# EAGLE board PCB Layout (EAGLE 9.7.0)
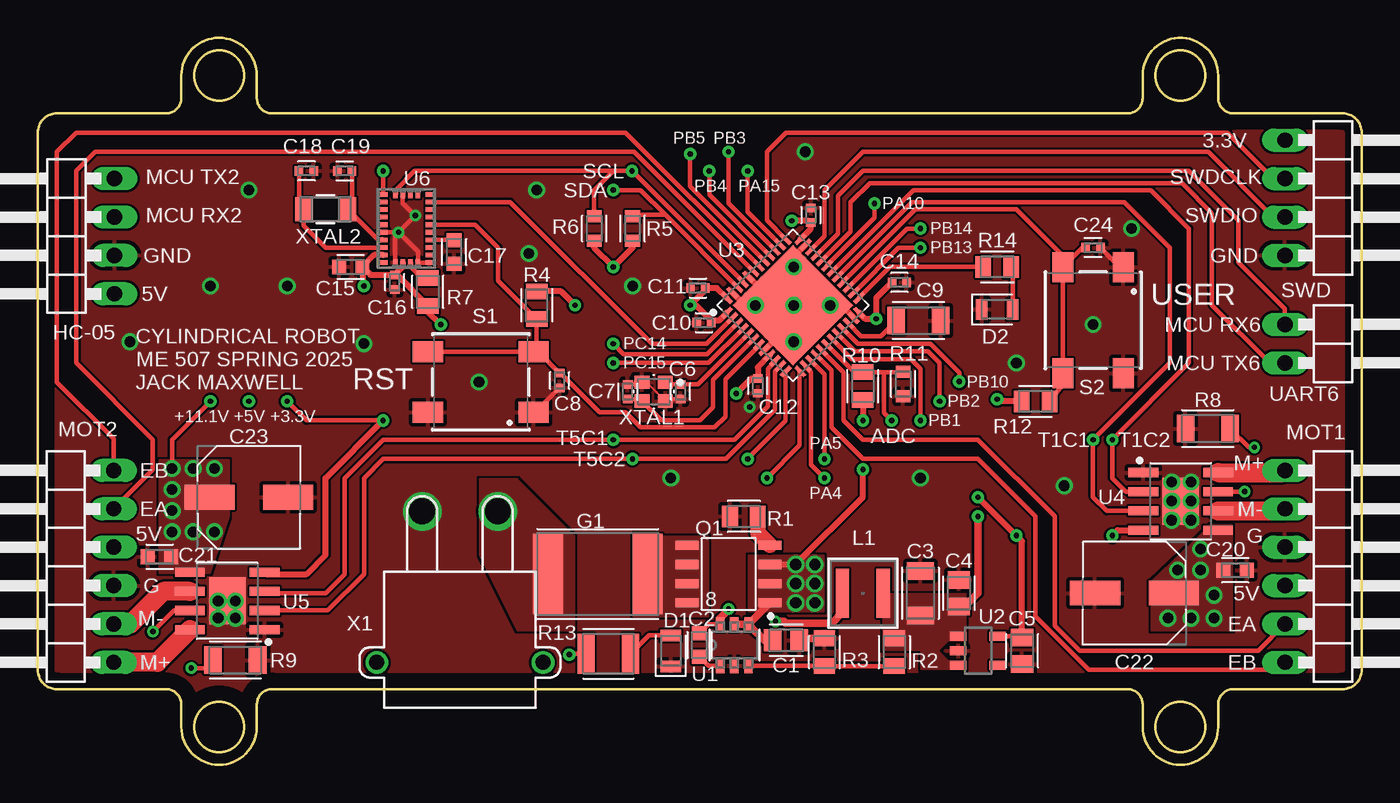
[diagram p0: board, top side]
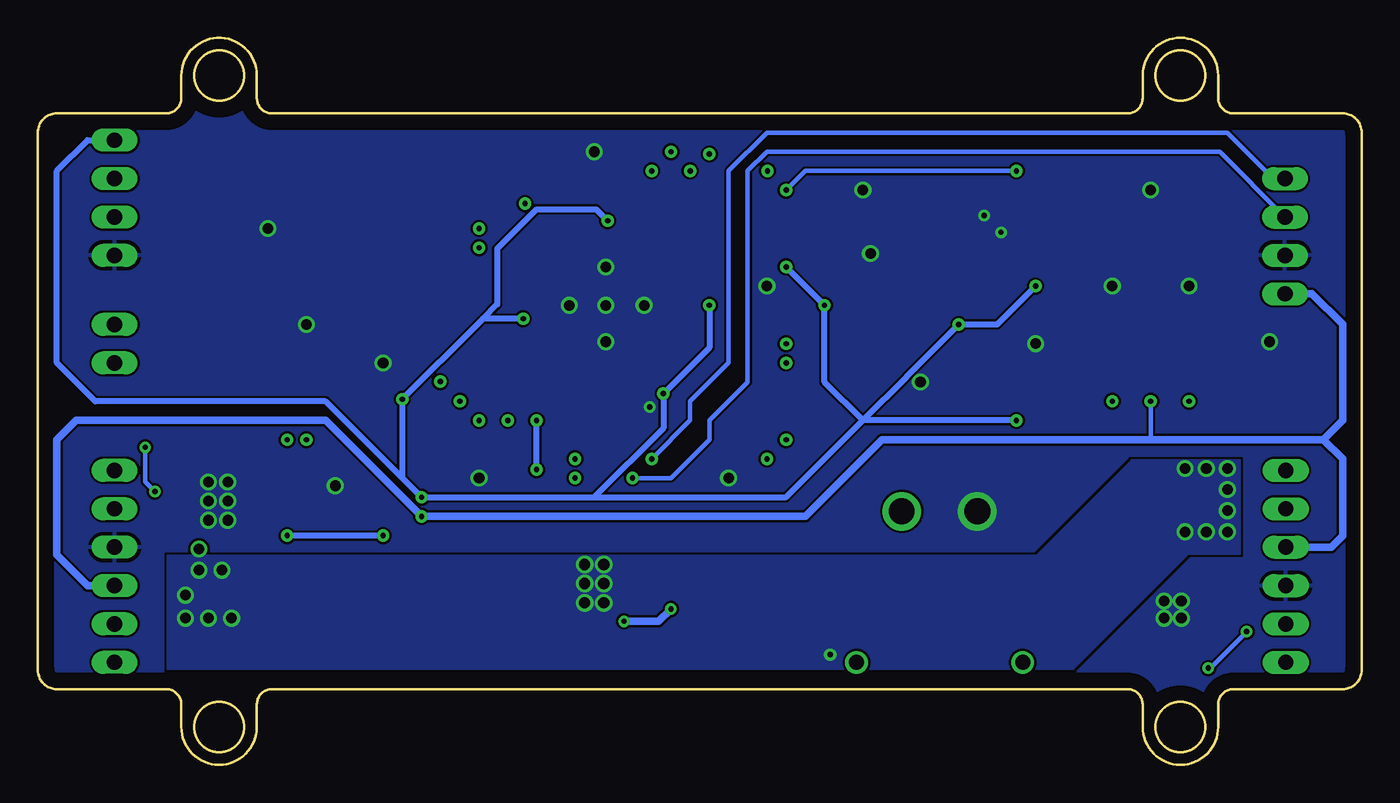
[diagram p1: board, bottom side, seen from below]

Size 87.63 x 48.1 mm. Coordinates in mm from the lower left corner, seen from the top.
Outline: 0,6.27 arc90 1.27,5 8.5,5 arc-90 9.5,4 9.5,2.5 arc180 14.5,2.5 14.5,4 arc-90 15.5,5 72.13,5 arc-90 73.13,4 73.13,2.5 arc180 78.13,2.5 78.13,4 arc-90 79.13,5 86.36,5 arc90 87.63,6.27 87.63,41.83 arc90 86.36,43.1 79.13,43.1 arc-90 78.13,44.1 78.13,45.6 arc180 73.13,45.6 73.13,44.1 arc-90 72.13,43.1 15.5,43.1 arc-90 14.5,44.1 14.5,45.6 arc180 9.5,45.6 9.5,44.1 arc-90 8.5,43.1 1.27,43.1 arc90 0,41.83 0,6.27
Outline: circle at 12,2.5 radius 1.65
Outline: circle at 12,45.6 radius 1.65
Outline: circle at 75.63,2.5 radius 1.65
Outline: circle at 75.63,45.6 radius 1.65
Copper layers (1*16): Top 0.035mm / dielectric 1.5mm / Bottom 0.035mm
Design rules "Fusion Electronics Design Rules": minimum track width 6mil, minimum drill 0.35mm, track to track 6mil, track to pad 6mil, pad to pad 6mil, via to via 6mil, smd to smd 6mil, copper to edge 40mil, drill to drill 6mil, minimum pad ring 10mil, minimum via ring 8mil, stop-mask expansion 4mil, vias tented up to drill 9999mil, thermal gap 10mil

## Footprints (pad centres in the part's own frame; a part is rotated, then mirrored left to right if it is on the bottom)
CAPC2012X110 = smd 1.165 x 1.465: 1 -0.875,0; 2 0.875,0
CAPC1608X85 = smd 0.921 x 0.97: 1 -0.775,0; 2 0.775,0
CAPC3216X135 = smd 1.165 x 1.815: 1 -1.475,0; 2 1.475,0
CAPC1005X60 = smd 0.56 x 0.629: 1 -0.485,0; 2 0.485,0
CAPAE660X800N = smd 3.314 x 1.622: 1 -2.601,0; 2 2.601,0
LEDC2012X110N_FLAT-G = smd 0.762 x 1.362: A 1.025,0; C -1.025,0
LEDC2012X110N_FLAT-R = smd 0.762 x 1.362: A 1.025,0; C -1.025,0
FUSC7351X160 = smd 2 x 5.3: 1 -3.3,0; 2 3.3,0
1X04/90 = drill 1.016 long: 1 -3.81,-3.81; 2 -1.27,-3.81; 3 1.27,-3.81; 4 3.81,-3.81
IND_XGL4040_COC = smd 0.864 x 3.251: 1 -1.346,0; 2 1.346,0
1X06/90 = drill 1.016 long: 1 -6.35,-3.81; 2 -3.81,-3.81; 3 -1.27,-3.81; 4 1.27,-3.81; 5 3.81,-3.81; 6 6.35,-3.81
SO-8 = smd 1.524 x 0.61: 1 -2.743,1.905; 2 -2.743,0.635; 3 -2.743,-0.635; 4 -2.743,-1.905; 5 2.743,-1.905; 6 2.743,-0.635; 7 2.743,0.635; 8 2.743,1.905
RESC2012X65 = smd 1.031 x 1.42: 1 -0.919,0; 2 0.919,0
RESC1608X60 = smd 0.799 x 0.974: 1 -0.815,0; 2 0.815,0
RESC3216X70 = smd 1.165 x 1.815: 1 -1.475,0; 2 1.475,0
RESC3224X71 = smd 1.131 x 2.66: 1 -1.47,0; 2 1.47,0
430481035816 = smd 2 x 1.4: 1 -3.5,2; 2 3.5,2; 3 -3.5,-2; 4 3.5,-2
LMR54406DBVR_TEX = smd 0.978 x 0.559: 1 -1.365,0.94; 2 -1.365,0; 3 -1.365,-0.94; 4 1.365,-0.94; 5 1.365,0; 6 1.365,0.94
DBV0005A-MFG = smd 1.1 x 0.6: 1 -1.3,0.95; 2 -1.3,0; 3 -1.3,-0.95; 4 1.3,-0.95; 5 1.3,0.95
QFN50P700X700X100-48N = smd 0.862 x 0.274: 1 -3.435,2.75; 2 -3.435,2.25; 3 -3.435,1.75; 4 -3.435,1.25; 5 -3.435,0.75; 6 -3.435,0.25; 7 -3.435,-0.25; 8 -3.435,-0.75; 9 -3.435,-1.25; 10 -3.435,-1.75; 11 -3.435,-2.25; 12 -3.435,-2.75; 25 3.435,-2.75; 26 3.435,-2.25; 27 3.435,-1.75; 28 3.435,-1.25; 29 3.435,-0.75; 30 3.435,-0.25; 31 3.435,0.25; 32 3.435,0.75; 33 3.435,1.25; 34 3.435,1.75; 35 3.435,2.25; 36 3.435,2.75 | smd 0.274 x 0.862: 13 -2.75,-3.435; 14 -2.25,-3.435; 15 -1.75,-3.435; 16 -1.25,-3.435; 17 -0.75,-3.435; 18 -0.25,-3.435; 19 0.25,-3.435; 20 0.75,-3.435; 21 1.25,-3.435; 22 1.75,-3.435; 23 2.25,-3.435; 24 2.75,-3.435; 37 2.75,3.435; 38 2.25,3.435; 39 1.75,3.435; 40 1.25,3.435; 41 0.75,3.435; 42 0.25,3.435; 43 -0.25,3.435; 44 -0.75,3.435; 45 -1.25,3.435; 46 -1.75,3.435; 47 -2.25,3.435; 48 -2.75,3.435 | smd 5.6 x 5.6: 49 0,0
DRV8231DDAR = smd 1.969 x 0.602: 1 -2.474,1.905; 2 -2.474,0.635; 3 -2.474,-0.635; 4 -2.474,-1.905; 5 2.474,-1.905; 6 2.474,-0.635; 7 2.474,0.635; 8 2.474,1.905 | smd 2.41 x 3.1: 9 0,0
QFN_BNO055_BOS = smd 0.305 x 0.533: 1 -2.25,1.537; 6 -2.25,-1.537; 7 -1.75,-1.537; 8 -1.25,-1.537; 9 -0.75,-1.537; 10 -0.25,-1.537; 11 0.25,-1.537; 12 0.75,-1.537; 13 1.25,-1.537; 14 1.75,-1.537; 15 2.25,-1.537; 20 2.25,1.537; 21 1.75,1.537; 22 1.25,1.537; 23 0.75,1.537; 24 0.25,1.537; 25 -0.25,1.537; 26 -0.75,1.537; 27 -1.25,1.537; 28 -1.75,1.537 | smd 0.432 x 0.305: 2 -2.235,0.75; 3 -2.235,0.25; 4 -2.235,-0.25; 5 -2.235,-0.75; 16 2.235,-0.75; 17 2.235,-0.25; 18 2.235,0.25; 19 2.235,0.75
1X02/90 = drill 1.016 long: 1 -1.27,-3.81; 2 1.27,-3.81
XT30PW-M = drill 1.7: 1 2.5,0; 2 -2.5,0 | drill 1: 3 5.5,10; 4 -5.5,10
OSCCC200X160X50N = smd 0.974 x 0.874: 1 -0.771,-0.621; 2 0.771,-0.621; 3 0.771,0.621; 4 -0.771,0.621
CHIP_NX3215S_NDK = smd 1.118 x 1.6: 1 -1.448,0; 2 1.448,0

## Placement (x,y rotation side)
C1  2.2uF  [CAPC2012X110]  49.53,8.23 0 top
C2  100nF  [CAPC1608X85]  43.79,7.92 90 top
C3  22uF  [CAPC3216X135]  58.42,11.35 90 top
C4  1uF  [CAPC2012X110]  60.96,11.35 90 top
C5  1uF  [CAPC2012X110]  65.15,7.54 270 top
C6  2pF  [CAPC1005X60]  42.55,24.69 270 top
C7  2pF  [CAPC1005X60]  39.04,24.69 90 top
C8  100nF  [CAPC1005X60]  34.54,25.43 270 top
C9  4.7uF  [CAPC3216X135]  58.29,29.38 0 top
C10  100nF  [CAPC1005X60]  44.1,29.26 180 top
C11  100nF  [CAPC1005X60]  43.69,31.54 180 top
C12  100nF  [CAPC1005X60]  47.65,25.07 270 top
C13  100nF  [CAPC1005X60]  51.16,36.37 90 top
C14  100nF  [CAPC1005X60]  57.02,31.92 0 top
C15  120nF  [CAPC1608X85]  20.71,32.94 180 top
C16  100nF  [CAPC1005X60]  23.62,31.92 270 top
C17  1uF  [CAPC1608X85]  27.56,33.93 270 top
C18  2pF  [CAPC1005X60]  17.78,39.29 0 top
C19  2pF  [CAPC1005X60]  20.32,39.29 180 top
C20  100nF  [CAPC1608X85]  79.25,12.87 0 top
C21  100nF  [CAPC1608X85]  8.06,13.76 180 top
C22  330uF  [CAPAE660X800N]  72.58,11.35 180 top
C23  330uF  [CAPAE660X800N]  13.97,17.7 0 top
C24  100nF  [CAPC1005X60]  69.85,34.21 0 top
D1  GRN  [LEDC2012X110N_FLAT-G]  41.91,7.54 90 top
D2  RED  [LEDC2012X110N_FLAT-R]  63.5,30.13 0 top
G1  2920L400/15MR  [FUSC7351X160]  37.07,12.62 0 top
HC-05  PINHD-1X4/90  [1X04/90]  1.27,34.97 90 top
L1  15uH  [IND_XGL4040_COC]  54.61,11.35 0 top
MOT1  PINHD-1X6/90  [1X06/90]  86.36,13.13 270 top
MOT2  PINHD-1X6/90  [1X06/90]  1.22,13.13 90 top
Q1  IRF7416TRPBF  [SO-8]  45.72,12.62 180 top
R1  10K  [RESC2012X65]  46.74,16.43 0 top
R2  120K  [RESC2012X65]  56.69,7.45 90 top
R3  22.1K  [RESC2012X65]  52.07,7.45 270 top
R4  10K  [RESC2012X65]  33.02,30.4 90 top
R5  2.2k  [RESC1608X60]  39.37,35.48 270 top
R6  2.2k  [RESC1608X60]  36.83,35.48 270 top
R7  10K  [RESC2012X65]  25.82,31.29 270 top
R8  [RESC3216X70]  77.44,22.25 180 top
R9  [RESC3216X70]  13.08,6.92 0 top
R10  10K  [RESC2012X65]  54.61,25.06 270 top
R11  3.6K  [RESC1608X60]  57.28,25.19 270 top
R12  10K  [RESC2012X65]  66.04,24.05 180 top
R13  0.56K  [RESC3224X71]  37.77,7.35 180 top
R14  0.27K  [RESC2012X65]  63.5,32.94 180 top
S1  RST  [430481035816]  29.32,25.32 180 top
S2  USER  [430481035816]  69.85,29.41 270 top
SWD  PINHD-1X4/90  [1X04/90]  86.36,37.51 270 top
U1  LMR54406FDBVR  [LMR54406DBVR_TEX]  46.1,7.92 90 top
U2  PTPS7A2033PDBVR  [DBV0005A-MFG]  62.23,7.54 0 top
U3  STM32F411CEU6  [QFN50P700X700X100-48N]  49.99,30.4 45 top
U4  DRV8231  [DRV8231DDAR]  75.65,17.43 0 top
U5  DRV8231  [DRV8231DDAR]  12.54,10.84 180 top
U6  BNO055  [QFN_BNO055_BOS]  24.41,35.48 90 top
UART6  PINHD-1X2/90  [1X02/90]  86.36,27.86 270 top
X1  XT30PW-M  [XT30PW-M]  27.94,16.77 180 top
XTAL1  25MHz +/- 20ppm  [OSCCC200X160X50N]  40.77,24.69 180 top
XTAL2  32.768kHz +/- 20ppm  [CHIP_NX3215S_NDK]  19.05,36.75 180 top

## Library data of the parts
C1 C4 C5 = Capacitor; CATEGORY: Capacitor; PACKAGE_SIZE: 0805; PACKAGE_TYPE: SMD; SUBCATEGORY: Ceramic Capacitors; TYPE: MLCC
C2 C15 C17 C20 C21 = Capacitor; CATEGORY: Capacitor; PACKAGE_SIZE: 0603; PACKAGE_TYPE: SMD; SUBCATEGORY: Ceramic Capacitors; TYPE: MLCC
C3 C9 = Capacitor; CATEGORY: Capacitor; PACKAGE_SIZE: 1206; PACKAGE_TYPE: SMD; SUBCATEGORY: Ceramic Capacitors; TYPE: MLCC
C6-C8 C10-C14 C16 C18 C19 C24 = Capacitor; CATEGORY: Capacitor; PACKAGE_SIZE: 0402; PACKAGE_TYPE: SMD; SUBCATEGORY: Ceramic Capacitors; TYPE: MLCC
C22 C23 = GVM1E331M0607
D1 = LED; CATEGORY: LED; COLOR: Green; DESCRIPTION: Green LED Indication 0805 (2012 Metric); PACKAGE_SIZE: 0805; PACKAGE_TYPE: SMD; SUBCATEGORY: Chip LED; TYPE: Square with Flat Top
D2 = LED; CATEGORY: LED; COLOR: Red; DESCRIPTION: Red LED Indication 0805 (2012 Metric); PACKAGE_SIZE: 0805; PACKAGE_TYPE: SMD; SUBCATEGORY: Chip LED; TYPE: Square with Flat Top
G1 = Fuse (Custom)
HC-05 SWD = Connector; CATEGORY: Connectors; DESCRIPTION: Header-Right Angle-4 Position; PACKAGE_TYPE: Through Hole; PITCH: 0.100" (2.54mm); SUBCATEGORY: Headers; TYPE: Male Pins
L1 = XGL4040-153MEC; COPYRIGHT: Copyright (C) 2025 Ultra Librarian. All rights reserved.; MANUFACTURER_PART_NUMBER: XGL4040-153MEC; MFR_NAME: Coilcraft
MOT1 MOT2 = Connector; CATEGORY: Connectors; DESCRIPTION: Header-Right Angle-6 Position; PACKAGE_TYPE: Through Hole; PITCH: 0.100" (2.54mm); SUBCATEGORY: Headers; TYPE: Male Pins
Q1 = Transistor; CATEGORY: Transistor; DATASHEET: https://www.infineon.com/dgdl/BSO201SP_H_1.32.pdf; DESCRIPTION: P-Channel 20 V 12A (Ta) 1.6W (Ta) Surface Mount PG-DSO-8; DRAIN_CURRENT: 12 A; IC_MAX: NA; MANUFACTURER: Infineon Technologies; MPN: BSO201SPHXUMA1; OPERATING_TEMPERATURE: -55°C ~ 150°C; PACKAGE_SIZE: 8-SOIC; PACKAGE_TYPE: SMD; PART_STATUS: ACTIVE; ROHS: COMPLIANT; SERIES: OptiMOS™; SUBCATEGORY: MOSFET; THERMALLOSS: 1.6 W; TYPE: P-Channel; VCEO_MAX: NA
R1-R4 R7 R10 R12 R14 = Resistor; CATEGORY: Resistors; DESCRIPTION: Chip Resistor 2.00 X 1.25 X 0.65 mm body 0805(2012-METRIC) Package; PACKAGE_SIZE: 0805; PACKAGE_TYPE: SMD
R5 R6 R11 = Resistor; CATEGORY: Resistors; DESCRIPTION: Chip Resistor 1.60 X 0.82 X 0.60 mm body 0603(1608-METRIC) Package; PACKAGE_SIZE: 0603; PACKAGE_TYPE: SMD
R8 R9 = Resistor; CATEGORY: Resistors; DESCRIPTION: Chip Resistor 3.20 X 1.60 X 0.70 mm body 1206(3216-METRIC) Package; PACKAGE_SIZE: 1206; PACKAGE_TYPE: SMD
R13 = Resistor; CATEGORY: Resistors; DESCRIPTION: Chip Resistor 3.20 X 2.49 X 0.71 mm body 1210(3225-METRIC) Package; PACKAGE_SIZE: 1210; PACKAGE_TYPE: SMD
S1 S2 = 430481035816; DATASHEET-URL: https://www.we-online.com/redexpert/spec/430481035816?ae; HEIGHT: 3.5mm; OPERATION-FORCE: 160g; PART-NUMBER: 430481035816; QTY: 2000
U1 = LMR54406FDBVR; COPYRIGHT: Copyright (C) 2025 Ultra Librarian. All rights reserved.; MANUFACTURER_PART_NUMBER: LMR54406FDBVR; MFR_NAME: Texas Instruments
U2 = TPS7A2033PDBVR; COPYRIGHT: Copyright (C) 2025 Ultra Librarian. All rights reserved.; MANUFACTURER_PART_NUMBER: PTPS7A2033PDBVR; MFR_NAME: Texas Instruments; REFDES: RefDes; TYPE: TYPE
U3 = STM32F411CEU6
U4 U5 = DRV8231
U6 = BNO055; COPYRIGHT: Copyright (C) 2025 Ultra Librarian. All rights reserved.; MANUFACTURER_PART_NUMBER: BNO055; MFR_NAME: Bosch Sensortec
UART6 = Connector; CATEGORY: Connectors; DESCRIPTION: Header-Right Angle-2 Position; PACKAGE_TYPE: Through Hole; PITCH: 0.100" (2.54mm); SUBCATEGORY: Headers; TYPE: Male Pins
X1 = XT-30
XTAL1 = NX2016SA
XTAL2 = NX3215SA; COPYRIGHT: Copyright (C) 2025 Ultra Librarian. All rights reserved.; MANUFACTURER_PART_NUMBER: NX3215SA-32.768K-STD-MUS-2; MFR_NAME: NDK

## Nets
!RST!: C8.1 R4.1 S1.3 S1.4 U3.7 U6.11
+3.3V: C5.1 C10.1 C11.1 C12.1 C13.1 C14.1 C15.1 C16.1 R4.2 R5.2 R6.2 R7.2 R12.2 SWD.1 U2.5 U3.1 U3.9 U3.24 U3.36 U3.48 U4.4 U5.4 U6.3 U6.28
+5V: C3.1 C4.1 HC-05.1 L1.2 MOT1.4 MOT2.4 R2.2 U2.1 U2.3
+12V: C1.1 C20.1 C21.1 C22.1 C23.1 Q1.1 Q1.2 Q1.3 R10.2 R13.2 U1.4 U1.5 U4.5 U5.5
ADC: R10.1 R11.1 U3.18
GND: C1.2 C3.2 C4.2 C5.2 C6.2 C7.2 C8.2 C9.2 C10.2 C11.2 C12.2 C13.2 C14.2 C15.2 C16.2 C17.2 C18.2 C19.2 C20.2 C21.2 C22.2 C23.2 C24.2 D1.C D2.C HC-05.2 MOT1.3 MOT2.3 R1.1 R3.1 R8.2 R9.2 R11.2 S1.1 S1.2 S2.1 S2.2 SWD.4 U1.2 U2.2 U3.8 U3.23 U3.35 U3.44 U3.47 U3.49 U4.1 U4.9 U5.1 U5.9 U6.2 U6.5 U6.6 U6.18 U6.25 X1.1 XTAL1.2 XTAL1.4
INT: U3.2 U6.14
N$1: C2.1 U1.1
N$2: C2.2 L1.1 U1.6
N$3: Q1.4 R1.2
N$4: R2.1 R3.2 U1.3
N$5: U2.4
N$6: G1.1 X1.2
N$7: G1.2 Q1.5 Q1.6 Q1.7 Q1.8
N$8: MOT1.2 U4.6
N$9: MOT1.1 U4.8
N$10: C17.1 U6.9
N$11: U3.38
N$12: U3.20
N$13: U3.39
N$14: U3.40
N$15: U3.41
N$16: R7.1 U6.4
N$17: R8.1 U4.7
N$18: D1.A R13.1
N$19: U3.19
N$20: U3.21
N$21: U3.26
N$23: U3.27
N$25: MOT2.2 U5.6
N$26: U3.4
N$27: U3.3
N$29: MOT2.1 U5.8
N$30: D2.A R14.1
N$31: U6.17
N$32: U6.7
N$33: U6.8
N$34: U6.10
N$35: R9.1 U5.7
N$36: U3.31
N$37: U3.15
N$39: U3.14
OSC32_IN: C18.1 U6.27 XTAL2.2
OSC32_OUT: C19.1 U6.26 XTAL2.1
OSC_IN: C6.1 U3.5 XTAL1.1
OSC_OUT: C7.1 U3.6 XTAL1.3
RED: R14.2 U3.25
RX2: HC-05.4 U3.12
RX6: U3.32 UART6.2
SCL: R6.1 U3.45 U6.19
SDA: R5.1 U3.46 U6.20
SWDCLK: SWD.2 U3.37
SWDIO: SWD.3 U3.34
T1C1: U3.29 U4.3
T1C2: U3.30 U4.2
T3C1: MOT1.6 U3.16
T3C2: MOT1.5 U3.17
T4C1: MOT2.6 U3.42
T4C2: MOT2.5 U3.43
T5C1: U3.10 U5.3
T5C2: U3.11 U5.2
TX2: HC-05.3 U3.13
TX6: U3.33 UART6.1
USER: C24.1 R12.1 S2.3 S2.4 U3.28
VCAP_1: C9.1 U3.22

## Tracks (layer width: path | path; a pad name or v marks a point on that pad's centre or on a via)
!RST!
  Top 0.305: S1.4 S1.3 | S1.3 33.02,27.52 R4.1 30.48,32.02 30.48,34.21 28.96,35.73 U6.11 | U3.7 47.73,27.71 45.52,25.49 45.52,23.04 44.8,22.32 39.89,22.32 38.9,23.32 37.19,23.32 34.6,25.91 C8.1 33.14,27.32 S1.3
+3.3V  (via drill 0.35 pad 0.81)
  Top 0.305: C5.1 65.07,8.49 U2.5 | 44.17,31.39 C11.1 | v22.86,22.78 17.78,22.78 v16.51,24.05
  Top 0.406: U5.4 15.14,12.62 17.78,12.62 19.05,13.89 19.05,18.97 v22.86,22.78 | C5.1 65.15,14.78 v64.77,15.16 v62.23,17.7 | v71.12,15.16 71.49,15.53 U4.4 | 44.17,31.39 v43.18,30.4 43.57,30.4 44.58,29.39 | v49.91,35.99 51.06,35.99 C13.1 51.16,35.47 U3.36 | R12.2 63.63,24.05 v63.5,24.18 | U6.28 22.27,33.73 C15.1 | C15.1 22.02,32.41 C16.1 | C16.1 23.77,32.41 R7.2 25.82,29.99 v26.67,29.13 | U6.3 24.16,32.95 C16.1 | 44.58,29.39 C10.1 | U3.48 44.95,31.54 C11.1 | U3.9 47.65,26.3 C12.1 47.22,25.55 v46.23,24.56 | U3.1 45.08,29.39 44.58,29.39 | C14.1 55.5,30.89 v55.5,29.51 54.76,29.51 U3.24 | v21.59,31.67 21.48,31.78 C15.1 | v35.56,30.4 34.64,31.32 R4.2 | R5.2 39.37,34.21 v38.1,32.94 36.83,34.21 R6.2
  Bottom 0.406: v64.77,15.16 v71.12,15.16 | v62.23,17.7 68.58,24.05 83.82,24.05 86.36,26.59 86.36,39.29 84.33,41.32 SWD.1 | v62.23,17.7 63.5,18.97 v63.5,24.18 58.48,29.19 58.17,29.51 | v43.18,30.4 43.18,27.61 v46.23,24.56 46.23,22.27 50.8,17.7 | v62.23,17.7 50.8,17.7 | 50.8,17.7 38.1,17.7 33.02,22.78 | v22.86,22.78 33.02,22.78 | 58.17,29.51 57.21,30.46 57.21,34.15 54.61,36.75 50.67,36.75 v49.91,35.99 | v55.5,29.51 58.17,29.51 | v21.59,31.67 24.13,29.13 v26.67,29.13 29.57,26.23 29.59,26.23 30.12,25.7 30.12,25.68 33.02,22.78 | 33.02,22.78 35.56,25.32 v35.56,30.4 v38.1,32.94
+5V  (via drill 0.35 pad 0.81)
  Top 0.508: C4.1 61.35,10.48 62.23,11.35 v62.23,16.43
  Bottom 0.305: 13.97,21.51 v13.97,24.05
  Bottom 0.508: MOT1.4 84.33,11.86 86.36,13.89 86.36,21.51 85.09,22.78 68.58,22.78 v62.23,16.43 36.83,16.43 31.75,21.51 13.97,21.51 2.54,21.51 | 2.54,21.51 1.27,20.24 1.27,15.16 2.03,14.4 MOT2.4 | HC-05.1 3.3,31.16 1.27,29.13 1.27,22.78 2.54,21.51
  pour Top (no thermals): 55.96,11.27 55.96,7.62 58.44,7.62 58.46,7.6 58.48,7.58 58.5,7.56 58.5,6.35 61.39,6.35 61.39,6.83 60.31,6.83 60.28,6.84 59.63,7.5 59.61,7.52 59.61,7.56 59.63,7.58 60.28,8.24 60.31,8.25 61.39,8.25 61.39,11.27
+12V  (via drill 0.35 pad 0.81, 0.7 pad 0.81, 0.75 pad 0.81)
  Top 0.305: R13.2 35.24,7.35 v35.18,7.29 | v8.89,19.61 8.89,21.51 v11.43,24.05
  Top 0.406: Q1.3 v50.16,13.26 54.61,17.7 v54.61,19.53 | R10.2 v54.61,22.78
  Top 0.508: U1.5 U1.4 | U1.4 Q1.1 | U1.4 47.62,8.71 48.1,8.23 C1.1
  Bottom 0.406: v54.61,19.53 v54.61,22.78
  other vias: 51.44,13.26 50.16,11.99 51.44,11.99 51.44,10.72 50.16,10.72 8.89,18.21 8.89,16.81 8.89,15.41 10.29,15.41 11.68,15.41 10.29,19.61 11.68,19.61 74.8,9.7 76.33,9.7 77.85,9.7 77.85,11.22 75.44,12.87 76.96,12.87 76.96,14.27
  pour Top (no thermals): 47.07,10.16 51.99,10.16 51.99,13.81 47.07,13.81
  pour Top (no thermals): 73.74,8.89 79.04,8.89 79.04,15.85 77.63,15.85 73.74,12.14
  pour Top (no thermals): 8.08,12.7 11.38,12.7 12.62,16.44 12.62,20.16 8.08,20.16
  pour Bottom (no thermals): 8.08,20.16 8.08,13.97 11.45,13.97 11.47,13.95 19.08,6.35 79.04,6.35 79.04,13.81 21.57,13.81 21.55,13.83 15.21,20.16
ADC  (via drill 0.35 pad 0.81)
  Top 0.305: R10.1 54.61,26.13 | R10.1 56.01,25.98 | 56.01,25.98 57.25,25.98 R11.1 | U3.18 54.05,25.98 R10.1 | 56.01,25.98 56.01,23.29 v56.52,22.78
GND  (via drill 0.35, 0.7 pad 0.81)
  Top 0.152: XTAL1.4 40.96,24.64 40.29,25.31 XTAL1.2
  Top 0.305: C6.2 41.67,24.2 XTAL1.4 | XTAL1.2 39.86,25.17 C7.2 | C8.2 32.92,23.32 S1.1 | U6.18 24.16,37.17 v24.99,36.34 v23.88,35.23 | v23.88,35.23 U6.25 | U6.2 23.66,35.01 v23.88,35.23 | U6.6 25.17,33.23 U6.5 25.16,33.95 v23.88,35.23 | C24.2 71.63,32.91 S2.1
  Top 0.406: U3.8 49.99,29.34 U3.49 | U3.23 53.17,30.4 v52.45,30.4 v50.04,30.4 U3.49 | U3.47 46.8,30.4 v47.5,30.4 U3.49 | U3.44 48.93,30.4 U3.49 | U3.35 49.99,33.58 U3.49
  Top 0.508: C1.2 50.55,8.37 R3.1
  other vias: 11.94,10.84 13.08,10.84 11.94,9.7 13.08,9.7 75.06,16.18 76.33,16.18 76.33,17.45 75.06,17.45 75.06,18.72 76.33,18.72 50.04,32.94 50.04,27.99 32.51,33.83 33.02,38.02 29.21,25.32 69.85,29.13 67.94,18.46 58.42,18.97 41.91,18.97 39.37,31.67 50.8,40.56 72.39,35.48 64.77,26.59 13.97,38.02 16.51,31.67 6.1,27.99 21.59,27.86 11.43,31.67 47.12,23.67
  pour Bottom (rank 6): -1.19,3.81 88.82,3.81 88.82,44.29 -1.19,44.29
  pour Top (rank 6): -1.19,3.81 88.82,3.81 88.82,44.29 -1.19,44.29
  pour Bottom (no thermals): 22.94,15.24 27.86,15.24 27.86,18.89 22.94,18.89
  pour Top (no thermals): 22.94,15.24 27.86,15.24 27.86,18.89 22.94,18.89
INT
  Top 0.305: U3.2 44.26,27.86 40.64,27.86 31.27,37.23 U6.14
N$1
  Top 0.305: C2.1 44.38,6.56 U1.1
N$2  (via drill 0.35)
  Top 0.305: U1.6 44.38,9.29 C2.2
  Top 0.508: v45.72,10.31 45.72,10.25 45.16,9.69 U1.6 | L1.1 53.26,10.08 52.55,9.37 49.5,9.37 49.38,9.49 v48.83,9.49
  Bottom 0.508: v45.72,10.31 46.53,9.49 v48.83,9.49
N$3
  Top 1.016: Q1.4 47.66,15.33 R1.2
N$4
  Top 0.305: U1.3 52.05,6.56 R3.2 R2.1
N$6
  pour Top (no thermals): 31.8,8.89 35.48,8.89 35.48,15.13 31.72,18.89 29.29,18.89 29.29,13.91
N$7
  pour Top (no thermals): 39.45,9.84 44.37,9.84 44.37,15.08 39.45,15.08
N$8
  Top 1.27: U4.6 82.41,16.8 MOT1.2
N$9
  Top 1.27: U4.8 82.41,19.34 MOT1.1
N$10
  Top 0.305: U6.9 27.53,34.73 C17.1
N$11  (via drill 0.35 pad 0.81)
  Top 0.305: U3.38 46.99,36.58 v46.99,39.29
N$12  (via drill 0.35 pad 0.81)
  Top 0.305: U3.20 54.09,27.35 58.93,27.35 59.69,26.59 v59.69,24.05
N$13  (via drill 0.35 pad 0.81)
  Top 0.305: U3.39 45.72,37.14 v45.72,40.56
N$14  (via drill 0.35 pad 0.81)
  Top 0.305: U3.40 44.45,37.7 v44.45,39.29
N$15  (via drill 0.35 pad 0.81)
  Top 0.305: U3.41 43.18,38.27 v43.18,40.41
N$16
  Top 0.305: U6.4 24.7,33.2 24.7,32.9 25.4,32.21 R7.1
N$17  (via drill 0.35)
  Top 0.305: U4.7 79.87,18.07 v79.88,18.08 | v80.52,21 80.16,21 R8.1
  Bottom 0.305: v79.88,18.08 80.52,18.72 v80.52,21
N$18
  Top 0.305: D1.A 40.46,8.57 R13.1
N$19  (via drill 0.35 pad 0.81)
  Top 0.305: U3.19 53.9,26.84 57.78,26.84 58.42,26.21 v58.42,22.78
N$20  (via drill 0.35 pad 0.81)
  Top 0.305: U3.21 54.29,27.86 59.07,27.86 60.99,25.93 v60.99,25.35
N$21  (via drill 0.35 pad 0.81)
  Top 0.305: U3.26 56.98,34.21 v58.42,34.21
N$23  (via drill 0.35 pad 0.81)
  Top 0.305: v58.42,35.48 57.54,35.48 U3.27
N$25
  Top 1.27: MOT2.2 6.14,9.32 8.3,11.48 U5.6
N$26  (via drill 0.35 pad 0.81)
  Top 0.305: U3.4 44.41,26.59 v38.1,26.59
N$27  (via drill 0.35 pad 0.81)
  Top 0.305: U3.3 44.29,27.17 38.79,27.17 v38.1,27.86
N$29
  Top 1.27: U5.8 7.91,6.78 MOT2.1
N$30
  Top 0.305: D2.A 64.53,32.83 R14.1
N$35  (via drill 0.35)
  Top 0.305: U5.7 9.02,10.21 v7.62,8.81 | v10.16,6.39 11.08,6.39 R9.1
  Bottom 0.305: v7.62,8.81 10.04,6.39 v10.16,6.39
N$36  (via drill 0.35 pad 0.81)
  Top 0.305: U3.31 52.24,33.07 55.37,36.2 v55.37,37.13
N$37  (via drill 0.35 pad 0.81)
  Top 0.305: U3.15 52.07,25.84 v52.07,20.24
N$39  (via drill 0.35 pad 0.81)
  Top 0.305: U3.14 50.82,26.32 51.18,25.97 51.18,19.86 v52.07,18.97
OSC32_IN
  Top 0.305: C18.1 17.3,37.06 XTAL2.2 17.6,35.66 19.05,34.21 22.85,34.21 U6.27
OSC32_OUT
  Top 0.305: C19.1 20.8,37.06 XTAL2.1 22.48,34.77 22.83,34.77 U6.26
OSC_IN
  Top 0.305: XTAL1.1 41.67,25.17 C6.1 43.7,25.17 U3.5
OSC_OUT
  Top 0.305: C7.1 39.86,24.2 XTAL1.3 41.28,22.78 43.81,22.78 44.7,23.67 44.7,25.47 U3.6
RED
  Top 0.305: U3.25 56.41,32.94 R14.2
RX2  (via drill 0.35 pad 0.81)
  Top 0.305: U3.12 49.5,22.75 v46.99,20.24
  Bottom 0.305: v46.99,20.24 44.45,22.78 44.45,24.05 41.91,26.59 41.91,39.29 39.37,41.83 8.89,41.83 5.84,38.78 HC-05.4
RX6
  Top 0.305: U3.32 53.8,35.27 53.8,37.21 55.07,38.48 75.74,38.48 77.72,36.5 77.72,30.42 81.55,26.59 UART6.2
SCL  (via drill 0.35 pad 0.81)
  Top 0.305: U3.45 v39.33,39.29 38.1,39.29 | 38.1,39.29 24.93,39.29 23.7,38.06 23.7,37.76 U6.19 | R6.1 36.83,38.02 38.1,39.29
SDA  (via drill 0.35 pad 0.81)
  Top 0.305: v22.86,39.29 22.87,39.28 U6.20 | U3.46 41.54,36.38 | 41.54,36.38 39.89,38.02 v38.1,38.02 | 41.54,36.38 39.45,36.38 R5.1
  Bottom 0.305: v38.1,38.02 36.83,39.29 v22.86,39.29
SWDCLK
  Top 0.305: SWD.2 81.79,38.78 78.74,41.83 49.53,41.83 48.26,40.56 48.26,36.02 U3.37
SWDIO
  Top 0.305: SWD.3 81.79,36.24 77.47,40.56 54.61,40.56 52.07,38.02 52.07,34.96 U3.34
T1C1  (via drill 0.35 pad 0.81)
  Top 0.305: U4.3 70.75,16.8 69.85,17.7 v69.85,21.51 74.93,26.59 74.93,34.21 71.93,37.21 57.85,37.21 U3.29
T1C2  (via drill 0.35 pad 0.81)
  Top 0.305: U4.2 72.02,18.07 71.12,18.97 v71.12,21.51 76.2,26.59 76.2,35.48 73.66,38.02 57.96,38.02 U3.30
T3C1
  Top 0.305: MOT1.6 82.04,6.27 69.58,6.27 66.04,9.81 66.04,16.43 62.23,20.24 54.61,20.24 52.53,22.32 52.53,26.09 U3.16
T3C2
  Top 0.305: MOT1.5 80.77,7.54 68.96,7.54 67.31,9.19 67.31,16.43 62.23,21.51 54.61,21.51 53.34,22.78 53.34,25.99 U3.17
T4C1
  Top 0.305: MOT2.6 5.03,21.57 1.27,25.32 1.27,40.56 2.54,41.83 38.91,41.83 U3.42
T4C2
  Top 0.305: MOT2.5 7.62,19.53 7.62,21.51 2.54,26.59 2.54,39.29 3.81,40.56 39.47,40.56 U3.43
T5C1  (via drill 0.35 pad 0.81)
  Top 0.305: U5.3 15.14,11.35 19.05,11.35 20.32,12.62 20.32,18.97 22.86,21.51 v38.1,21.51 46.12,21.51 48.34,23.73 48.34,26.22 48.8,26.67 U3.10
T5C2  (via drill 0.35 pad 0.81)
  Top 0.305: U5.2 19.18,10.21 21.59,12.62 21.59,18.97 22.86,20.24 v39.37,20.24 45.55,20.24 48.8,23.49 48.8,26.03 U3.11
TX2  (via drill 0.35 pad 0.81)
  Top 0.305: U3.13 50.42,25.98 50.42,21.13 v48.26,18.97
  Bottom 0.305: v48.26,18.97 45.72,18.97 43.18,21.51 43.18,22.78 40.64,25.32 40.64,39.29 39.37,40.56 9.4,40.56 HC-05.3
TX6
  Top 0.305: UART6.1 82.55,30.16 79.45,33.26 79.45,36.04 76.2,39.29 54.61,39.29 52.96,37.64 52.96,35.14 U3.33
USER
  Top 0.305: R12.1 67.85,25.13 S2.4 S2.3 | C24.1 69.15,34.21 S2.3 | U3.28 58.1,36.75 64.77,36.75 67.85,33.67 S2.3
VCAP_1
  Top 0.305: U3.22 54.49,28.37 55.8,28.37 C9.1

## Text on the board
tPlace: PB5 | PB3 | 3.3V | SCL | MCU TX2 | SDA | PB4 | PA15 | SWDCLK | PA10 | MCU RX2 | SWDIO | PB14 | PB13 | GND | GND | 5V | USER | MCU RX6 | PC14 | PC15 | MCU TX6 | CYLINDRICAL ROBOT / ME 507 SPRING 2025 / JACK MAXWELL | RST | PB10 | PB2 | +11.1V | +5V | +3.3V | PB1 | T5C1 | PA5 | ADC | T1C1 | T1C2 | T5C2 | EB | M+ | PA4 | EA | M- | 5V | G | G | 5V | M- | EA | M+ | EB